# EAGLE board Qwiic_Iridium_9603N-Panel-Panel (EAGLE 9.4.2)

Size 184.91 x 184.91 mm. Coordinates in mm from the lower left corner, seen from the top.
Outline: 8.89,8.89 8.89,15.24
Outline: 0,6.35 184.91,6.35 184.91,0 0,0 0,6.35
Outline: 178.56,178.05 184.91,178.05 184.91,6.86 178.56,6.86 178.56,178.05
Outline: 0,184.91 184.91,184.91 184.91,178.56 0,178.56 0,184.91
Outline: 0,178.05 6.35,178.05 6.35,6.86 0,6.86 0,178.05
Copper layers (1*16): Top 0.035mm / dielectric 1.5mm / Bottom 0.035mm
Design rules "SparkFun-2-layer-PCBWay-LIMIT": minimum track width 6mil, minimum drill 0.3mm, track to track 6mil, track to pad 6mil, pad to pad 6mil, via to via 6mil, smd to smd 6mil, copper to edge 6mil, drill to drill 6mil, minimum pad ring 6mil, minimum via ring 6mil, stop-mask expansion 4mil, vias tented up to drill 25mil, thermal gap 10mil

## Footprints (pad centres in the part's own frame; a part is rotated, then mirrored left to right if it is on the bottom)
FIDUCIAL-1X2 = smd 1 x 1: 1 0,0
FIDUCIAL-1.5X3 = smd 1.5 x 1.5: 1 0,0

## Placement (x,y rotation side)
E$1  [FIDUCIAL-1X2]  17.78,180.15 0 top
E$2  [FIDUCIAL-1X2]  17.78,180.15 0 bottom
E$3  [FIDUCIAL-1X2]  167.13,180.15 0 top
E$4  [FIDUCIAL-1X2]  167.13,180.15 0 bottom
E$5  [FIDUCIAL-1.5X3]  17.78,4.76 0 top
E$6  [FIDUCIAL-1.5X3]  17.78,4.76 0 bottom

## Library data of the parts
E$1-E$4 = SparkFun-Aesthetics
E$5 E$6 = SparkFun-Retired

## Text on the board
Dimension: Route Out | Route Out | Route Out | Route Out